# Altium PCB SampleProject.PcbDoc
Units mm, origin at the board's own origin, x right, y up, seen from the top; angles counter-clockwise.
Board outline 62.23 x 71.75 mm, 2 copper layers (Top Layer, Bottom Layer); 11 components, 7 nets, 33 pads, 0 vias.
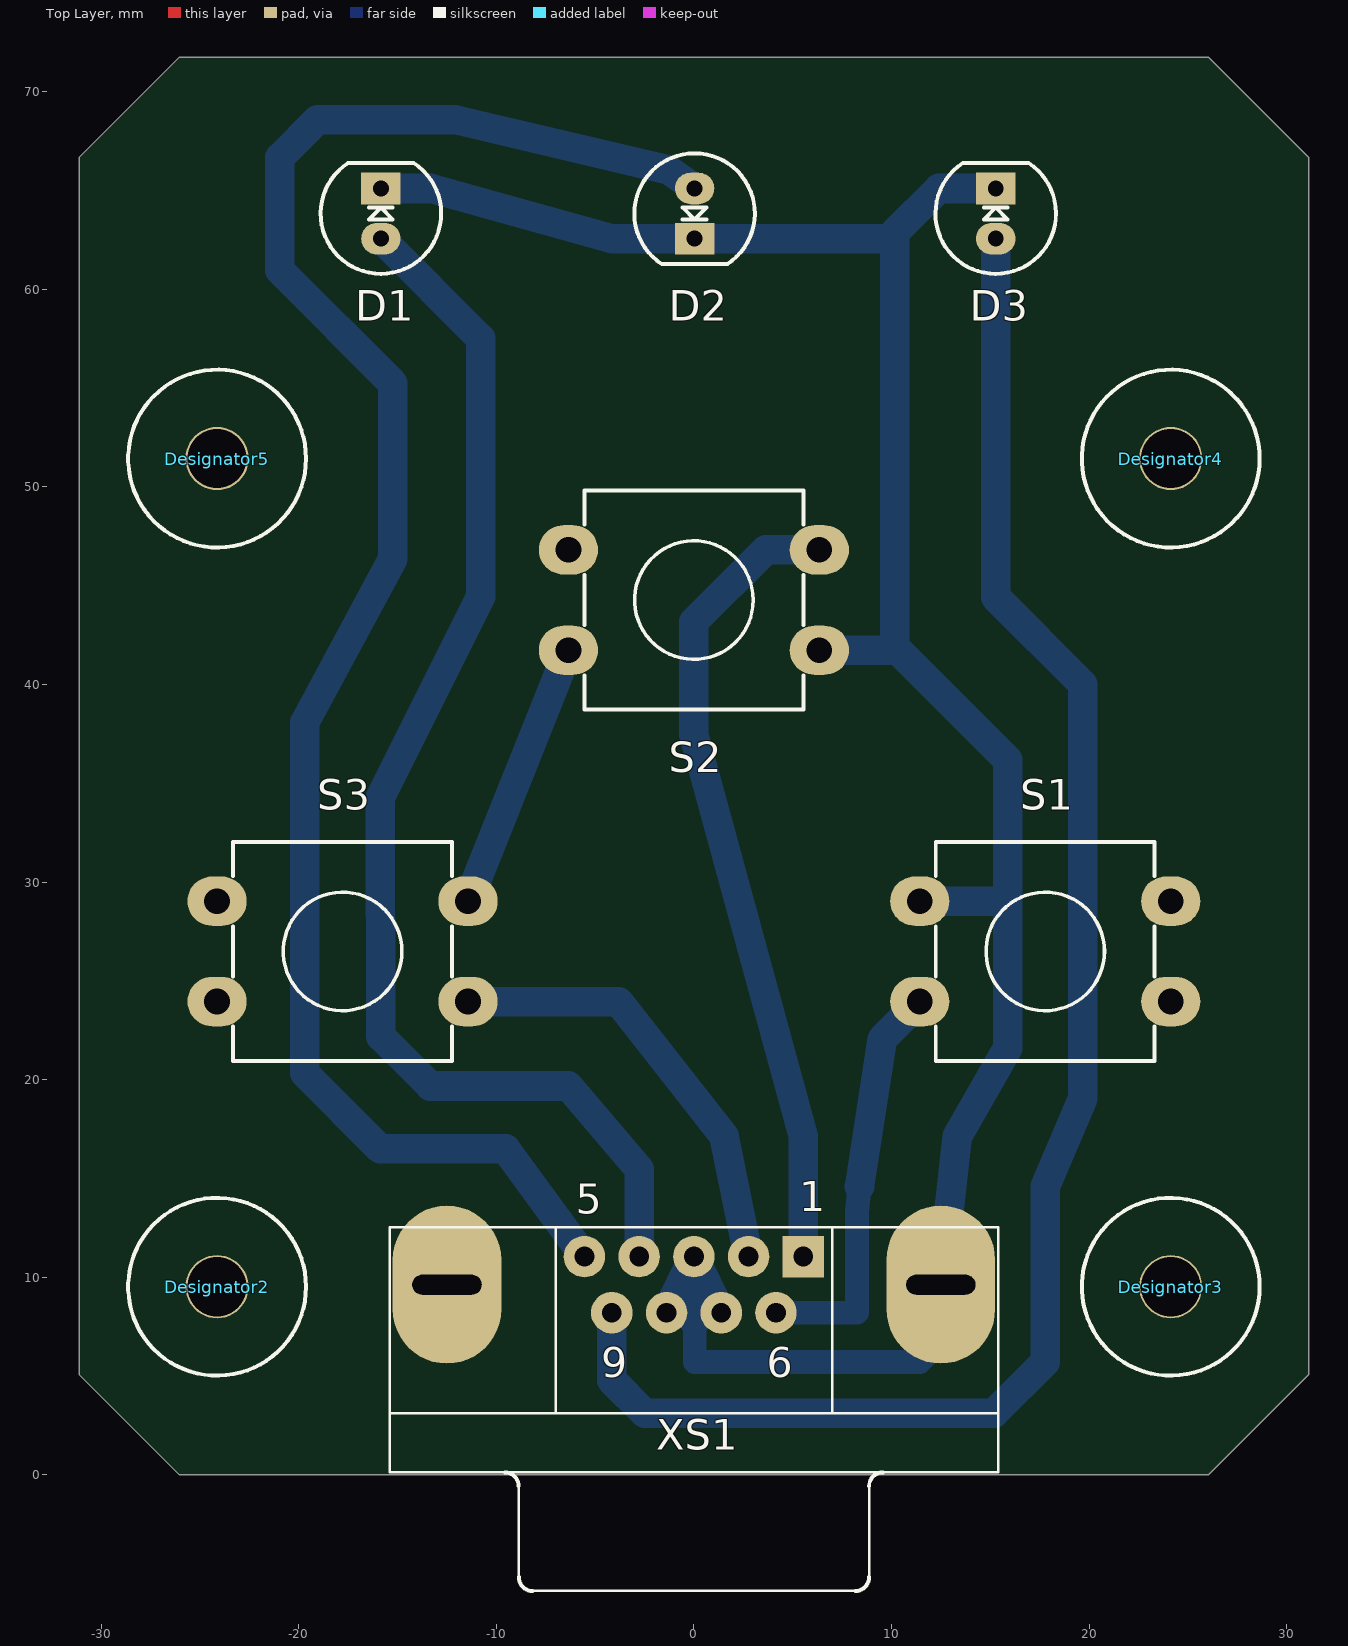
[diagram p0: Top Layer view]
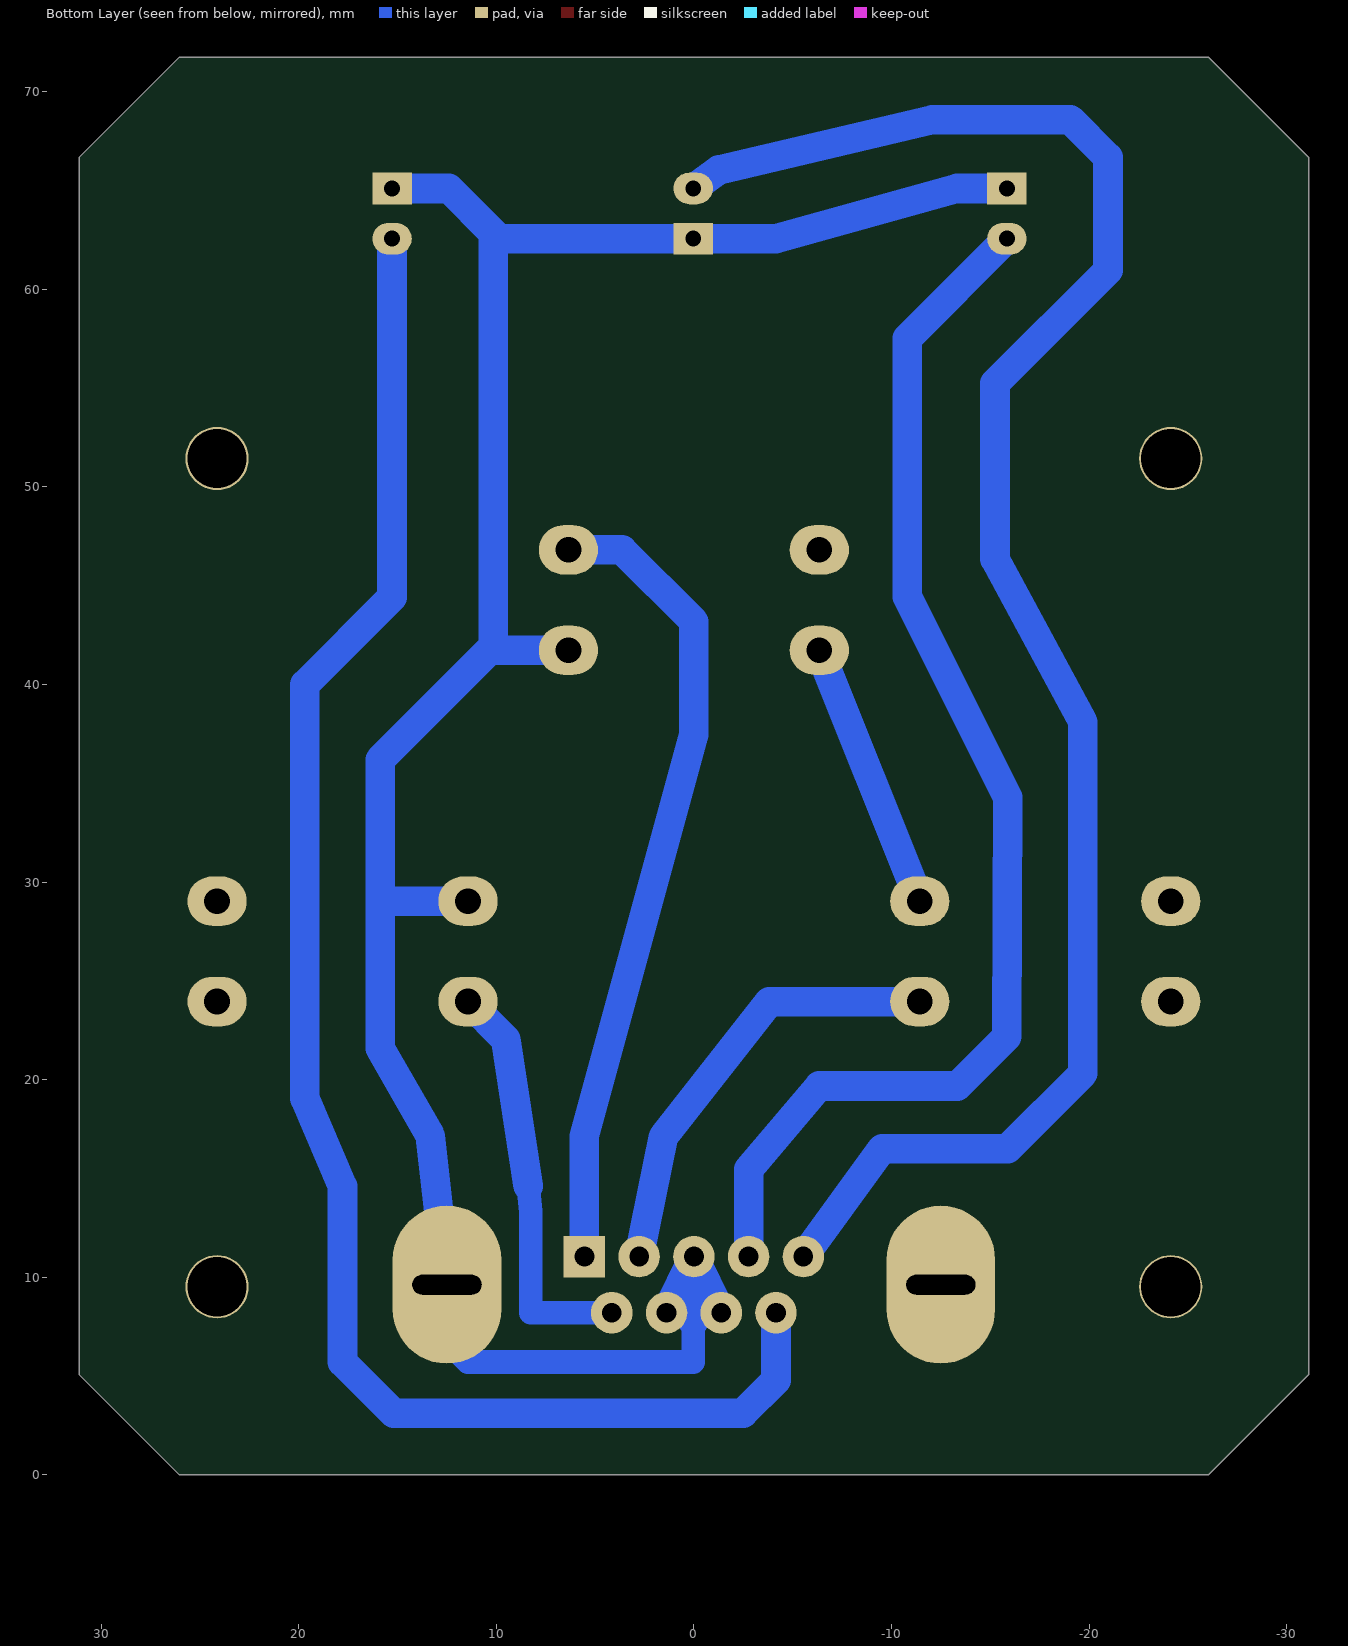
[diagram p1: Bottom Layer view, seen from below]
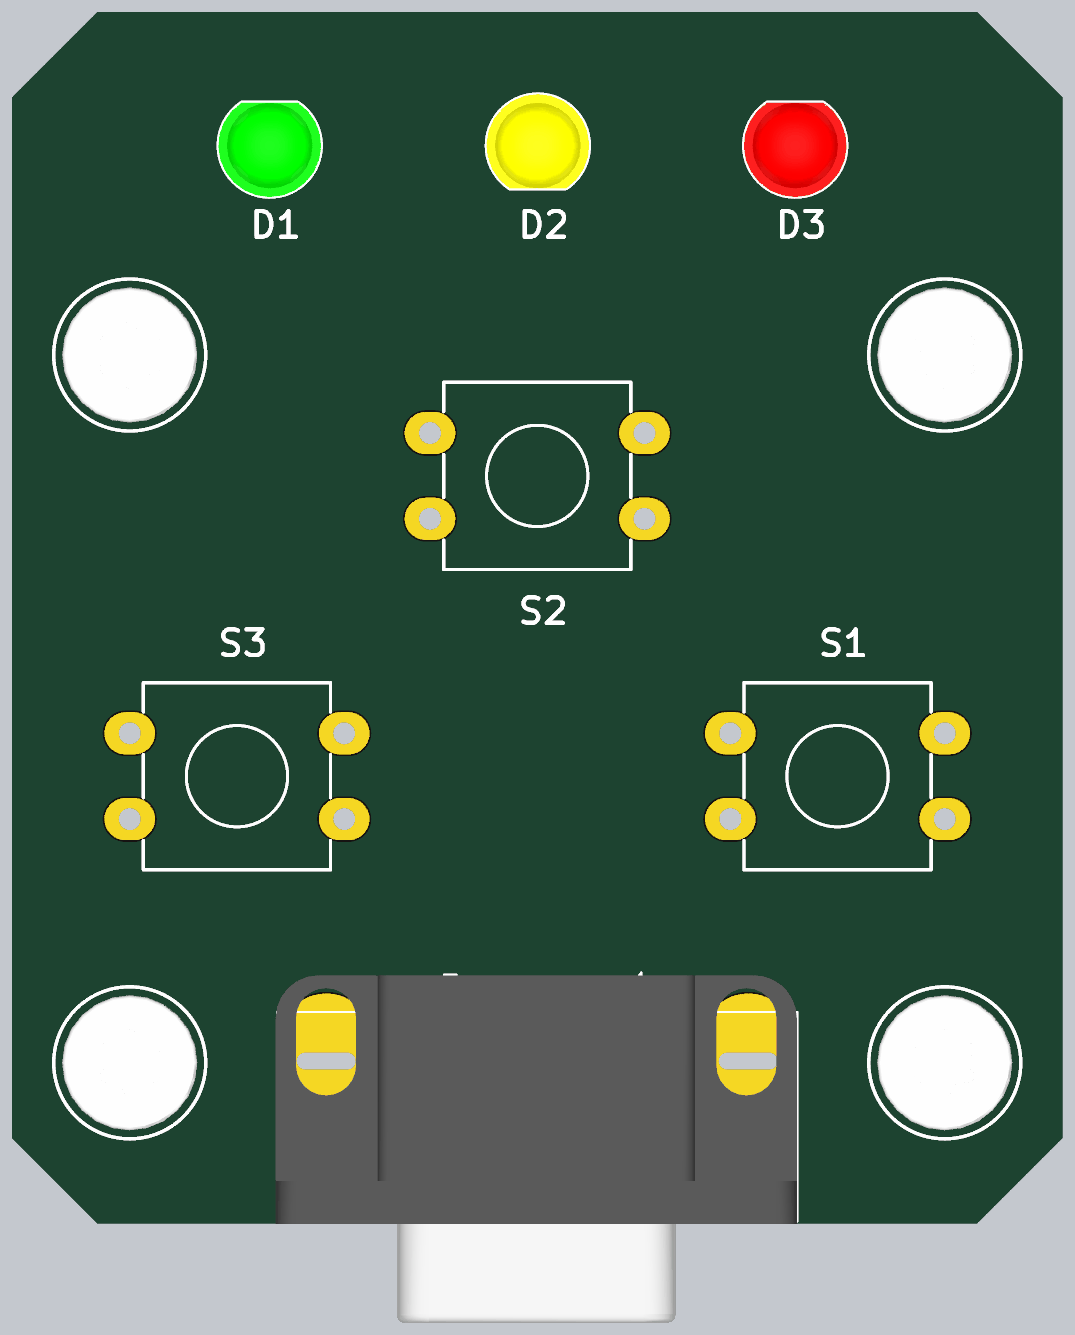
[diagram p2: 3D render of the assembled board from above, using the file's embedded part models]

## Layer stack, top to bottom
Top Layer: signal copper 0.0356
Dielectric: dielectric 0.32, FR-4, Dk 4.8
Bottom Layer: signal copper 0.0356

## Board outline
-31.115,5.08 -31.115,66.675 -26.035,71.755 26.035,71.755 31.115,66.675 31.115,5.08 26.035,0 -26.035,0

## Design rules (kind name [scope] priority, off if disabled: settings)
Clearance [All] p1: gap=0.39
Height [All] p1: minheight=0 maxheight=27 prefheight=12.7
HoleSize [All] p1: absolutevalues=TRUE maxlimit=4 minlimit=0.025 maxpercent=80.000 minpercent=20.000
PolygonConnect [All] p1: connectstyle=Relief reliefconductorwidth=0.254 reliefentries=4 polygonreliefangle="90 Angle" airgapwidth=0.254
RoutingVias [All] p1: holewidth=0.711 width=1.27 viastyle="Through Hole" minholewidth=0.711 minwidth=1.27 maxholewidth=0.711 maxwidth=1.27
SilkscreenOverComponentPads SilkToSolderMaskClearance [IsPad] p1: minsilkscreentomaskgap=0
SolderMaskExpansion [All] p1: expansion=0.102
Width [All] p1: maxlimit=3 minlimit=0.254 preferedwidth=0.254
25 further rules are at their usual default settings.

## Classes and differential pairs
component class SampleProject: D1 D2 D3 S1 S2 S3 XS1

## Components (designator, comment, footprint, x,y, rotation, side; value= is the part's Value field where it differs from the comment)
D1 "Светодиод  выводной 5mm  Зелёный" LED_5MM_GREEN_1C-2A -15.84,63.835 r270 top
D2 "Светодиод  выводной 5mm  Жёлтый" LED_5MM_YELLOW_1C-2A 0.035,63.835 r90 top locked
D3 "Светодиод  выводной 5mm  Красный" LED_5MM_RED_1C-2A 15.275,63.835 r270 top locked
Designator2 "Comment" BOSSARD_BN5687-3061619_v -24.13,9.525 r0 top locked
Designator3 "Comment" BOSSARD_BN5687-3061619_v 24.13,9.525 r0 top locked
Designator4 "Comment" BOSSARD_BN5687-3061619_v 24.13,51.435 r0 top locked
Designator5 "Comment" BOSSARD_BN5687-3061619_v -24.13,51.435 r0 top locked
S1 "Кнопка TACT 12x12-5.0" "TACT 12x12-5.0 DIP" 17.78,26.495 r90 top locked
S2 "Кнопка TACT 12x12-5.0" "TACT 12x12-5.0 DIP" 0,44.275 r270 top locked
S3 "Кнопка TACT 12x12-5.0" "TACT 12x12-5.0 DIP" -17.78,26.495 r90 top locked
XS1 "Разъём DSUB-9F" DSUB-9F 5.54,11.049 r180 top locked

## Footprints (in the part's own frame and the unit in brackets; to place one, negate y for a bottom-side part, rotate by r counter-clockwise, add the part's x,y. Pads: shape width x height; smd on the part's side, far side on the other; paste and mask are expansions set on the pad)
BOSSARD_BN5687-3061619_v [mm] "M4 L=10mm Hexalobular Socket Pan Head Screw, Fully Threaded - Stainless Steel A2"
  silkscreen extent -4.5,-4.5 4.5,4.5, body extent -4,-4 4,4, height 3.1
DSUB-9F [mm] "Female"
  rect 2.1x2.1 hole 1: 1(0,0)
  round 2.1 hole 1: 2(2.77,0) 3(5.54,0) 4(8.31,0) 5(11.08,0) 6(1.385,2.84) 7(4.155,2.84) 8(6.925,2.84) 9(9.695,2.84)
  oval 5.5x8 hole 1 slot 3.5 at 0 deg: 10(-6.955,1.42) 11(18.035,1.42)
  silkscreen extent -9.86,-1.48 20.94,16.92, body extent -9.83,-3.66 21.03,16.92, height 12.7
LED_5MM_GREEN_1C-2A [mm] "LED, Green, Body Dia. 5.08mm, Pin spacing 2.54mm"
  rect 1.6x2 hole 0.8: 1(-1.27,0)
  oval 1.6x2 hole 0.8: 2(1.27,0)
  silkscreen extent -2.56,-3.05 3.05,3.05, body extent -2.54,-3.05 3.05,3.05, height 14.32
LED_5MM_RED_1C-2A [mm] "LED, Red, Body Dia. 5.08mm, Pin spacing 2.54mm"
  rect 1.6x2 hole 0.8: 1(-1.27,0)
  oval 1.6x2 hole 0.8: 2(1.27,0)
  silkscreen extent -2.56,-3.05 3.05,3.05, body extent -2.54,-3.05 3.05,3.05, height 14.32
LED_5MM_YELLOW_1C-2A [mm] "LED, Yellow, Body Dia. 5.08mm, Pin spacing 2.54mm"
  rect 1.6x2 hole 0.8: 1(-1.27,0)
  oval 1.6x2 hole 0.8: 2(1.27,0)
  silkscreen extent -2.56,-3.05 3.05,3.05, body extent -2.54,-3.05 3.05,3.05, height 14.32
"TACT 12x12-5.0 DIP" [mm] "Кнопка тактовая, DIP, 12х12, h=5.0 мм"
  oval 2.5x3 hole 1.3: 1(2.54,6.35) 1(2.54,-6.35) 2(-2.54,6.35) 2(-2.54,-6.35)
  silkscreen extent -5.54,-5.54 5.54,5.54, body extent -5.54,-6.98 5.54,6.98, height 5

## Part data
D1 D2 D3: library part LED, "Typical LED"
Designator2 Designator3 Designator4 Designator5: library part BOSSARD_BN5687-3061619_v
S1 S2 S3: library part SW-PB, "Push-Button (TACT)"
XS1: library part DSUB-9F, "DSub-9 pin female 90*"

## Free pads (board coordinates)
  round 3.2 hole 3 unplated: 0(-24.13,9.525) 0(-24.13,51.435) 0(24.13,9.525) 0(24.13,51.435)

## Nets (pads, with @x,y where several pads share a name; then routed paths per layer and width w, separated by ;. In a path a pad name is that pad's centre, name@x,y a point inside that pad or via, vN(x,y) a via of type N, cw(c..) or ccw(c..) an arc to the next point about the centre after c; other vN are vias at no path point)
GND: D1.1 D2.1 D3.1 S1.1 S2.1 S3.1 XS1.3 XS1.7 XS1.8 XS1.10 XS1.11 | length 139.6
  Bottom Layer w1.2: 0.037,7.736 0.037,5.715 11.43,5.715 XS1.10@12.495,6.78
  Bottom Layer w1.5: D1.1 -13.335,65.105 -4.145,62.565 D2.1 9.525,62.565 ; S3.1@-11.43,29.035 S2.1@-6.35,41.735 ; 0.037,7.736 0.084,7.878 0,8.209 ; S2.1@6.35,41.735 10.16,41.735 ; S1.1@11.43,29.035 15.24,29.035 ; XS1.10@12.495,6.78 XS1.10 13.335,17.145 15.875,21.59 15.875,36.195 10.16,41.91 10.16,62.865 12.4,65.105 D3.1 ; 0,8.209 XS1.3 ; 0,8.209 XS1.8 XS1.3 ; 0,8.209 XS1.7 XS1.3
NetD1_2: D1.2 XS1.4 | length 64.1
  Bottom Layer w1.5: D1.2 -10.795,57.52 -10.795,44.45 -15.875,34.29 -15.84,22.19 -13.335,19.685 -6.35,19.685 -2.77,15.47 XS1.4
NetD2_2: D2.2 XS1.5 | length 90.7
  Bottom Layer w1.5: XS1.5 -9.525,16.51 -15.875,16.51 -19.685,20.32 -19.685,38.1 -15.24,46.355 -15.24,55.245 -20.955,60.96 -20.955,66.675 -19.05,68.58 -12.065,68.58 -1.27,66.04 D2.2
NetD3_2: D3.2 XS1.9 | length 86.2
  Bottom Layer w1.5: XS1.9 -4.155,4.79 -2.494,3.129 15.194,3.129 17.78,5.715 17.78,14.605 19.685,19.05 19.685,40.005 15.275,44.415 D3.2
NetS1_2: S1.2 XS1.6 | length 20.7
  Bottom Layer w1.2: XS1.6 8.255,8.209 8.255,13.335 8.382,14.605
  Bottom Layer w1.5: 8.382,14.605 9.525,22.05 S1.2@11.43,23.955
NetS2_2: S2.2 XS1.1 | length 40.7
  Bottom Layer w1.5: XS1.1 5.54,17.145 0,37.465 0,43.18 3.635,46.815 S2.2@6.35,46.815
NetS3_2: S3.2 XS1.2 | length 22.5
  Bottom Layer w1.5: S3.2@-11.43,23.955 -3.81,23.955 1.529,17.145 XS1.2

## Silkscreen, mask and mechanical layers (free items; w line width, h text height)
Board:
  the board outline again, w0.2
Drill Drawing:
  text ".Legend" at -57.785,87.63 h2.5

## Text inside footprints (layer, text, board x,y; h text height)
XS1: Top Overlay "6" at 3.683,4.953 h1.52; Top Overlay "9" at -4.699,4.953 h1.52; Top Overlay "5" at -5.969,13.208 h1.52; Top Overlay "1" at 5.334,13.335 h1.52